# Altium PCB BAILEY.PcbDoc (part 6 of 8)
Units mil, origin at the board's own origin, x right, y up, seen from the top; angles counter-clockwise.
Board outline 4500 x 4000 mil, 4 copper layers (Signal Layer 1, Signal Layer 2, Signal Layer 3, Signal Layer 4), stack 59.904 mil thick; 190 components, 117 nets, 664 pads, 291 vias.
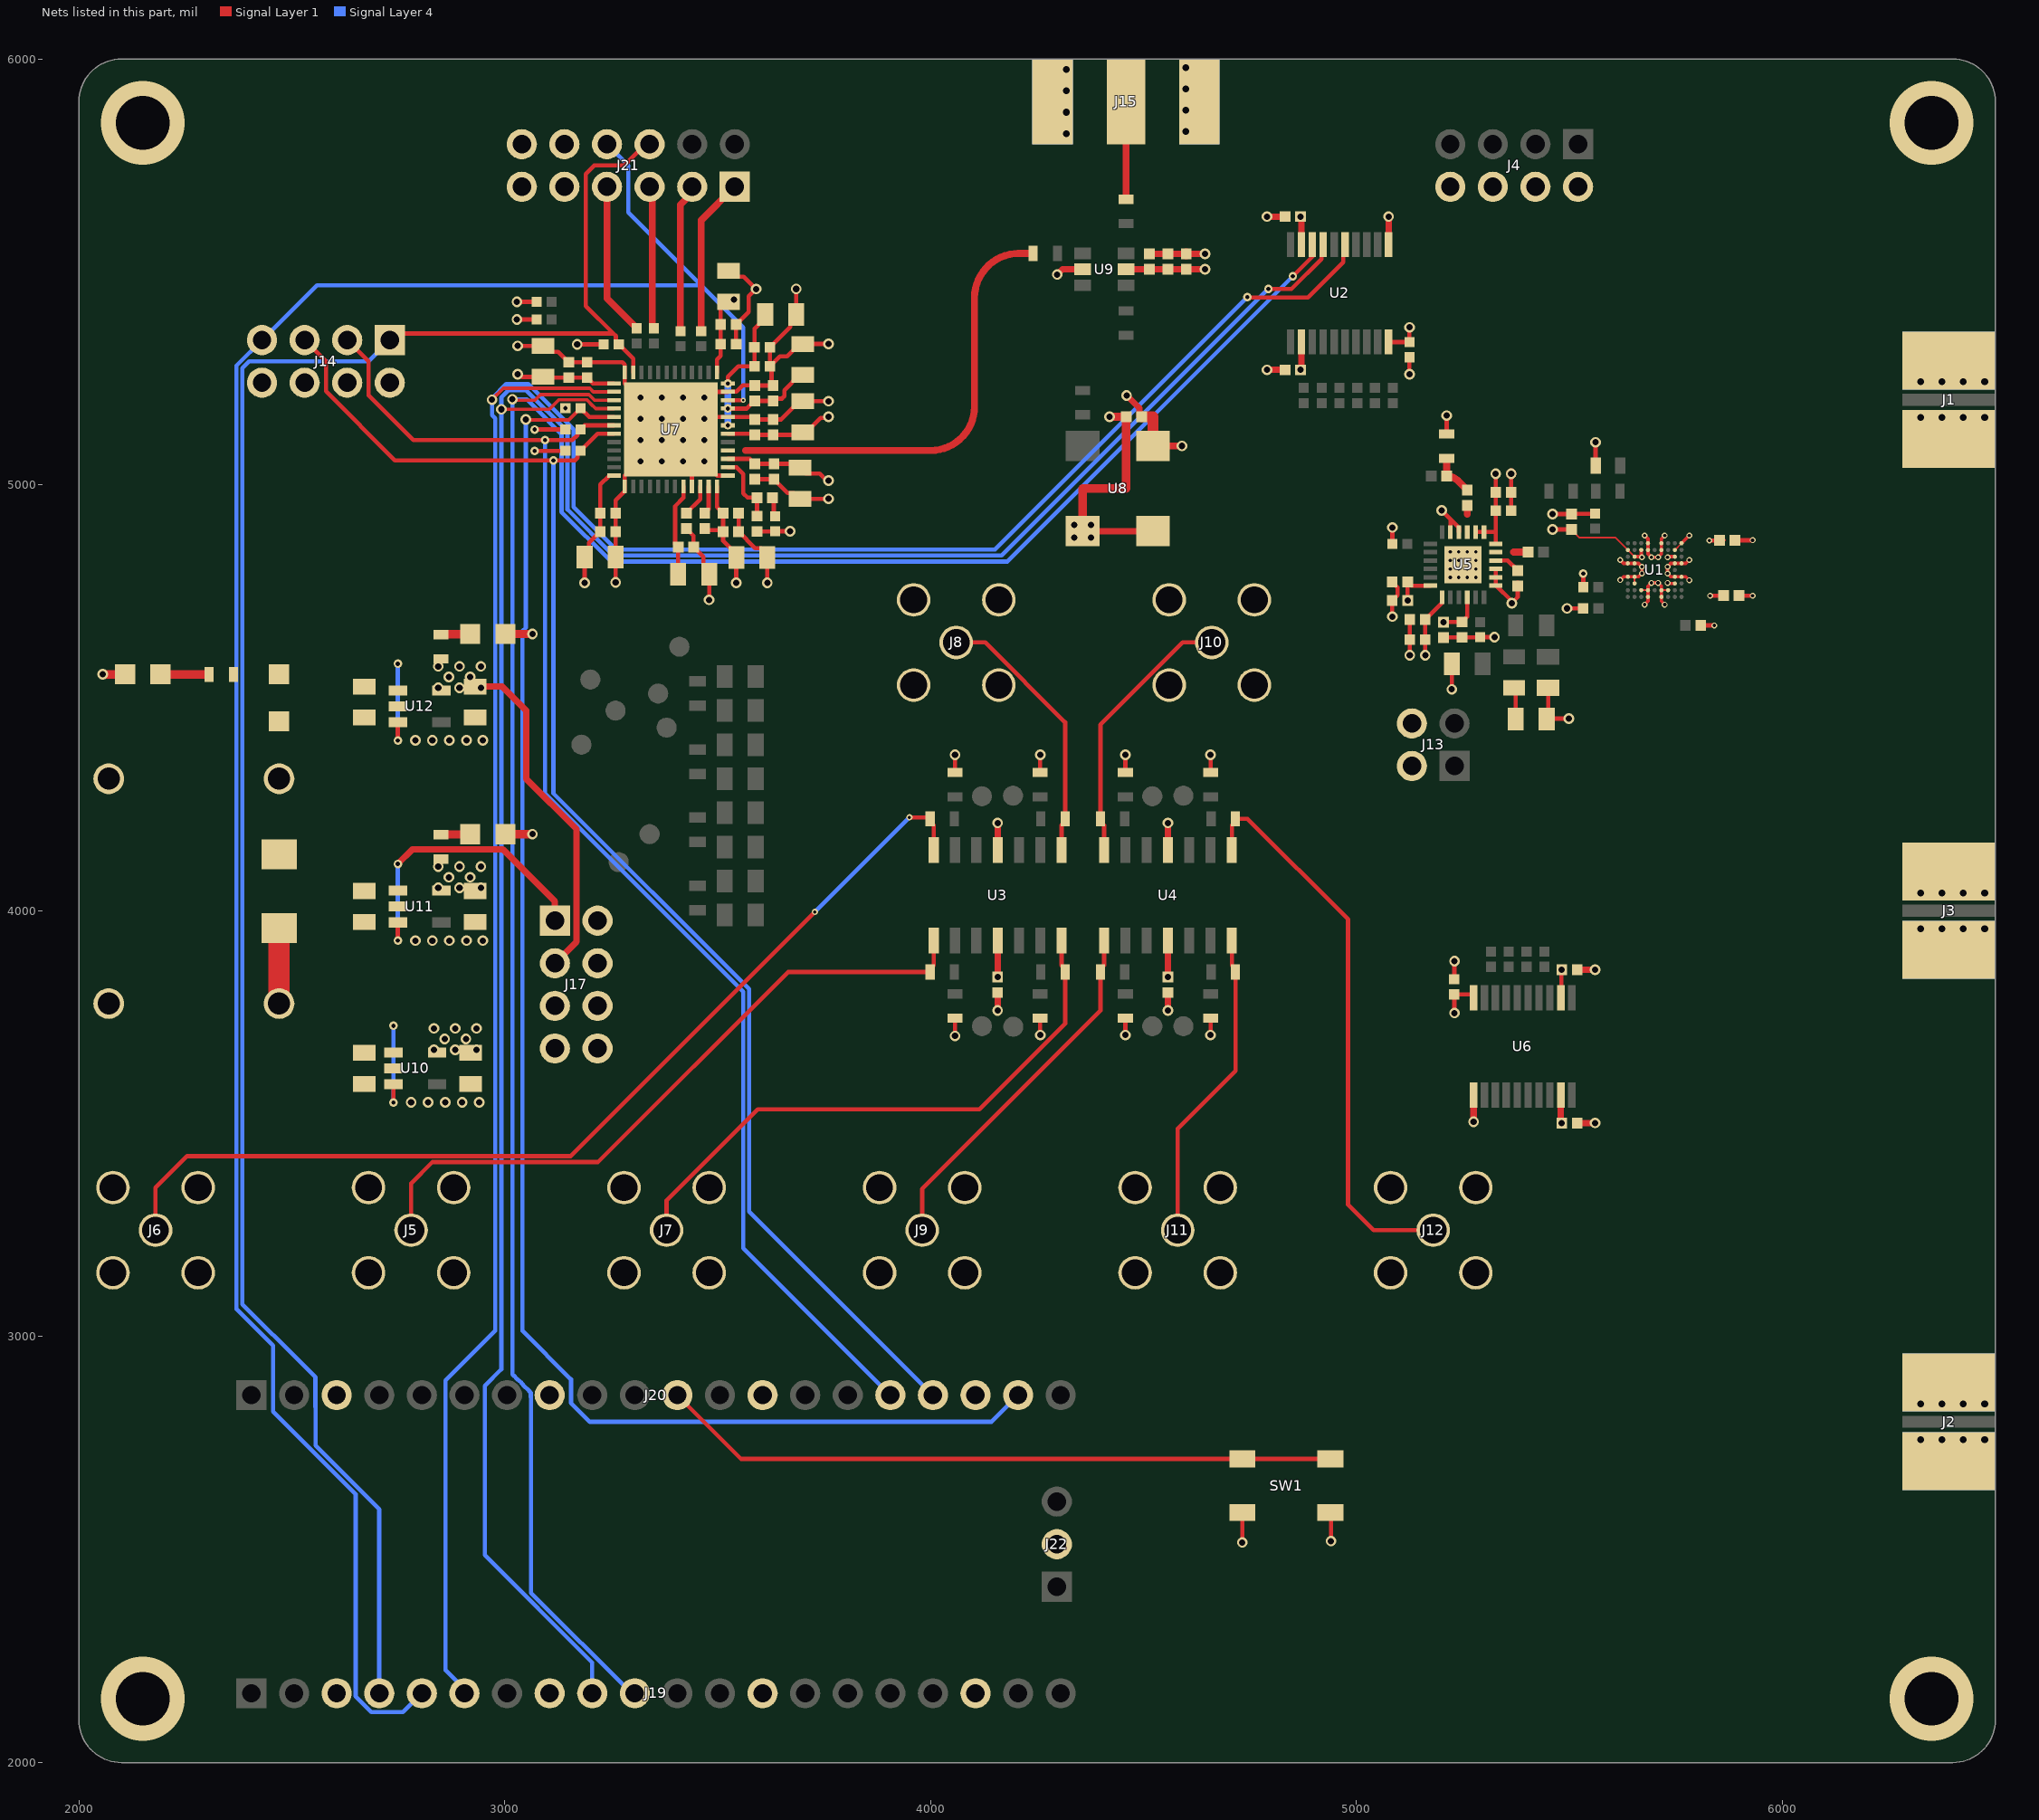
[diagram p4: the nets of this part, all layers, seen from the top]

## Part data (continued)
R54: library part RES, "100mW Thick Film Resistors 75V ±100ppm/℃ ±1% 1kΩ 0603 Chip Resistor - Surface Mount ROHS", Case Code (Imperial)=0603, Manufacturer=Yageo, Manufacturer Part Number=RC0603FR-071KL, Max Operating Temperature=155°C, Min Operating Temperature=-55°C, Power Dissipation=100mW, Supplier Part Number=311-1.00KHRCT-ND, Temperature Coefficient=100ppm/°C, Tolerance=1%, Voltage Rating=50V, Working Voltage=75V, Case Code (Metric)=0603, Case/Package=0603, Category="Chip SMD Resistors", China RoHS=Non-Compliant, ComponentLink1Description=https://datasheet.octopart.com:443/RC0603FR-071KL-Yageo-datasheet-175887523.pdf?src-supplier=Newark, ComponentLink1URL=https://datasheet.octopart.com:443/RC0603FR-071KL-Yageo-datasheet-175887523.pdf?src-supplier=Newark, ComponentLink2Description=https://datasheet.octopart.com:443/RC0603FR-071KL-Yageo-datasheet-34211833.pdf?src-supplier=Newark, ComponentLink2URL=https://datasheet.octopart.com:443/RC0603FR-071KL-Yageo-datasheet-34211833.pdf?src-supplier=Newark, ComponentLink3Description=https://datasheet.octopart.com:443/RC0603FR-071KL-Yageo-datasheet-12596169.pdf?src-supplier=Newark, ComponentLink3URL=https://datasheet.octopart.com:443/RC0603FR-071KL-Yageo-datasheet-12596169.pdf?src-supplier=Newark, ComponentLink4Description=https://datasheet.octopart.com:443/RC0603FR-071KL-Yageo-datasheet-499455.pdf?src-supplier=Newark, ComponentLink4URL=https://datasheet.octopart.com:443/RC0603FR-071KL-Yageo-datasheet-499455.pdf?src-supplier=Newark, ComponentLink5Description=https://datasheet.octopart.com:443/RC0603FR-071KL-Yageo-datasheet-503470.pdf?src-supplier=Newark, ComponentLink5URL=https://datasheet.octopart.com:443/RC0603FR-071KL-Yageo-datasheet-503470.pdf?src-supplier=Newark, ComponentLink6Description=https://datasheet.octopart.com:443/RC0603FR-071KL-Yageo-datasheet-62067350.pdf?src-supplier=element14+APAC, ComponentLink6URL=https://datasheet.octopart.com:443/RC0603FR-071KL-Yageo-datasheet-62067350.pdf?src-supplier=element14+APAC, ComponentLink7Description=https://datasheet.octopart.com:443/RC0603FR-071KL-Yageo-datasheet-21426514.pdf?src-supplier=element14+APAC, ComponentLink7URL=https://datasheet.octopart.com:443/RC0603FR-071KL-Yageo-datasheet-21426514.pdf?src-supplier=element14+APAC, ComponentLink8Description=https://datasheet.octopart.com:443/RC0603FR-071KL-Yageo-datasheet-141265859.pdf?src-supplier=Upverter, ComponentLink8URL=https://datasheet.octopart.com:443/RC0603FR-071KL-Yageo-datasheet-141265859.pdf?src-supplier=Upverter, ComponentLink9Description=https://datasheet.octopart.com:443/RC0603FR-071KL-Yageo-datasheet-103092701.pdf?src-supplier=Upverter, ComponentLink9URL=https://datasheet.octopart.com:443/RC0603FR-071KL-Yageo-datasheet-103092701.pdf?src-supplier=Upverter, ComponentLink10Description=https://sigma.octopart.com:443/138820526/technical_drawing/Yageo-RC0603FR-071KL.pdf?src-supplier=Upverter, ComponentLink10URL=https://sigma.octopart.com:443/138820526/technical_drawing/Yageo-RC0603FR-071KL.pdf?src-supplier=Upverter, ComponentLink11Description=https://datasheet.octopart.com:443/RC0603FR-071KL-Yageo-datasheet-68297981.pdf?src-supplier=Upverter, ComponentLink11URL=https://datasheet.octopart.com:443/RC0603FR-071KL-Yageo-datasheet-68297981.pdf?src-supplier=Upverter, ComponentLink12Description=https://datasheet.octopart.com:443/RC0603FR-071KL-Yageo-datasheet-8328172.pdf?src-supplier=Farnell, ComponentLink12URL=https://datasheet.octopart.com:443/RC0603FR-071KL-Yageo-datasheet-8328172.pdf?src-supplier=Farnell, ComponentLink13Description=https://datasheet.octopart.com:443/RC0603FR-071KL-Yageo-datasheet-13691069.pdf?src-supplier=Farnell, ComponentLink13URL=https://datasheet.octopart.com:443/RC0603FR-071KL-Yageo-datasheet-13691069.pdf?src-supplier=Farnell, ComponentLink14Description=https://datasheet.octopart.com:443/RC0603FR-071KL-Yageo-datasheet-15599030.pdf?src-supplier=Seeed+Studio, ComponentLink14URL=https://datasheet.octopart.com:443/RC0603FR-071KL-Yageo-datasheet-15599030.pdf?src-supplier=Seeed+Studio, ComponentLink15Description=https://datasheet.octopart.com:443/RC0603FR-071KL-Yageo-Group-datasheet-176638170.pdf?src-supplier=Future+Electronics, ComponentLink15URL=https://datasheet.octopart.com:443/RC0603FR-071KL-Yageo-Group-datasheet-176638170.pdf?src-supplier=Future+Electronics, ComponentLink16Description=https://datasheet.octopart.com:443/RC0603FR-071KL-Yageo-datasheet-164759695.pdf?src-supplier=Future+Electronics, ComponentLink16URL=https://datasheet.octopart.com:443/RC0603FR-071KL-Yageo-datasheet-164759695.pdf?src-supplier=Future+Electronics, ComponentLink17Description=https://datasheet.octopart.com:443/RC0603FR-071KL-Yageo-datasheet-137700087.pdf?src-supplier=Future+Electronics, ComponentLink17URL=https://datasheet.octopart.com:443/RC0603FR-071KL-Yageo-datasheet-137700087.pdf?src-supplier=Future+Electronics, ComponentLink18Description=https://datasheet.octopart.com:443/RC0603FR071KL-Yageo-datasheet-27584510.pdf?src-supplier=Future+Electronics, ComponentLink18URL=https://datasheet.octopart.com:443/RC0603FR071KL-Yageo-datasheet-27584510.pdf?src-supplier=Future+Electronics, ComponentLink19Description=https://datasheet.octopart.com:443/RC0603FR-071KL-Yageo-datasheet-8324193.pdf?src-supplier=Future+Electronics, ComponentLink19URL=https://datasheet.octopart.com:443/RC0603FR-071KL-Yageo-datasheet-8324193.pdf?src-supplier=Future+Electronics, ComponentLink20Description=https://datasheet.octopart.com:443/RC0603FR-071KL-Yageo-datasheet-79472498.pdf?src-supplier=Megastar, ComponentLink20URL=https://datasheet.octopart.com:443/RC0603FR-071KL-Yageo-datasheet-79472498.pdf?src-supplier=Megastar, ComponentLink21Description=https://datasheet.octopart.com/RC0603FR-071KL-Yageo-datasheet-73766026.pdf, ComponentLink21URL=https://datasheet.octopart.com/RC0603FR-071KL-Yageo-datasheet-73766026.pdf, ComponentLink22Description=https://datasheet.octopart.com:443/RC0603FR-071KL-Yageo-datasheet-118562.pdf?src-supplier=DigiKey, ComponentLink22URL=https://datasheet.octopart.com:443/RC0603FR-071KL-Yageo-datasheet-118562.pdf?src-supplier=DigiKey, ComponentLink23Description=http://sigma.octopart.com:80/conflict_mineral_statement/Yageo-company-3.pdf?src-supplier=Compliance+Statements, ComponentLink23URL=http://sigma.octopart.com:80/conflict_mineral_statement/Yageo-company-3.pdf?src-supplier=Compliance+Statements, ComponentLink24Description=http://sigma.octopart.com:80/rohs_statement/Yageo-company-2.pdf?src-supplier=Compliance+Statements, ComponentLink24URL=http://sigma.octopart.com:80/rohs_statement/Yageo-company-2.pdf?src-supplier=Compliance+Statements, Composition="Thick Film", Contact Plating=Tin, Country of Origin="Mainland China, Taiwan", Depth=800µm, Export Control Classification Number (ECCN) Code=EAR99, Harmonized Tariff Schedule (HTS) Code=8533.21.00.30, Height=450µm, Introduction Date=2004-10-04, Lead Free="Lead Free", Length=1.6mm, Lifecycle Status=Production, Military Standard=Not, Mounting Technology="Surface Mount", Number of Terminals=2, Package Size=0603, Packaging="Tape and Reel", Pins=2, Pricing="1=0.1, 10=0.008, 25=0.0076, 50=0.0072, 100=0.0061, 250=0.00568, 1000=0.00569, 5000=0.00204 (USD)", Radiation Hardening=No, REACH SVHC=Yes, RoHS=Compliant, Schedule B="8533210045, 8533210045|8533210045|8533210045|8533210045|8533210045|8533210045|8533210045|8533210045|8533210045|8533210045|8533210045|8533210045|8533210045|8533210045|8533210045|8533210045|8533210045|8533210045|8533210045|8533210045|8533210045|8533210045|8533210045|85", Stock=5944272, Supplier=DigiKey, Termination=SMD/SMT, Voltage Rating (DC)=50V, Width=800µm
R55: library part RES, "Res Thick Film 0603 178 Ohm 1% 0.1W(1/10W) ±100ppm/C Pad SMD T/R", Case Code (Imperial)=0603, Manufacturer=Yageo, Manufacturer Part Number=RC0603FR-07178RL, Max Operating Temperature=155°C, Min Operating Temperature=-55°C, Power Dissipation=100mW, Supplier Part Number=311-178HRCT-ND, Temperature Coefficient=100ppm/°C, Tolerance=1%, Voltage Rating=75V, Voltage Rating (DC)=50V, Case/Package=0603, Category="Chip SMD Resistors", China RoHS=Non-Compliant, ComponentLink1Description=https://datasheet.octopart.com:443/RC0603FR-07178RL-Yageo-datasheet-175887523.pdf?src-supplier=Newark, ComponentLink1URL=https://datasheet.octopart.com:443/RC0603FR-07178RL-Yageo-datasheet-175887523.pdf?src-supplier=Newark, ComponentLink2Description=https://datasheet.octopart.com:443/RC0603FR-07178RL-Yageo-datasheet-103092701.pdf?src-supplier=Upverter, ComponentLink2URL=https://datasheet.octopart.com:443/RC0603FR-07178RL-Yageo-datasheet-103092701.pdf?src-supplier=Upverter, ComponentLink3Description=https://datasheet.octopart.com:443/RC0603FR-07178RL-Yageo-Group-datasheet-176638170.pdf?src-supplier=Future+Electronics, ComponentLink3URL=https://datasheet.octopart.com:443/RC0603FR-07178RL-Yageo-Group-datasheet-176638170.pdf?src-supplier=Future+Electronics, ComponentLink4Description=https://datasheet.octopart.com:443/RC0603FR-07178RL-Yageo-datasheet-164759695.pdf?src-supplier=Future+Electronics, ComponentLink4URL=https://datasheet.octopart.com:443/RC0603FR-07178RL-Yageo-datasheet-164759695.pdf?src-supplier=Future+Electronics, ComponentLink5Description=https://datasheet.octopart.com:443/RC0603FR-07178RL-Yageo-datasheet-137700087.pdf?src-supplier=Future+Electronics, ComponentLink5URL=https://datasheet.octopart.com:443/RC0603FR-07178RL-Yageo-datasheet-137700087.pdf?src-supplier=Future+Electronics, ComponentLink6Description=https://datasheet.octopart.com:443/RC0603FR-07178RL-Yageo-datasheet-101672632.pdf?src-supplier=Future+Electronics, ComponentLink6URL=https://datasheet.octopart.com:443/RC0603FR-07178RL-Yageo-datasheet-101672632.pdf?src-supplier=Future+Electronics, ComponentLink7Description=https://datasheet.octopart.com:443/RC0603FR-07178RL-Yageo-datasheet-15599030.pdf?src-supplier=Future+Electronics, ComponentLink7URL=https://datasheet.octopart.com:443/RC0603FR-07178RL-Yageo-datasheet-15599030.pdf?src-supplier=Future+Electronics, ComponentLink8Description=https://datasheet.octopart.com:443/RC0603FR-07178RL-Yageo-datasheet-12596169.pdf?src-supplier=Future+Electronics, ComponentLink8URL=https://datasheet.octopart.com:443/RC0603FR-07178RL-Yageo-datasheet-12596169.pdf?src-supplier=Future+Electronics, ComponentLink9Description=https://datasheet.octopart.com:443/RC0603FR-07178RL-Yageo-datasheet-8328172.pdf?src-supplier=Future+Electronics, ComponentLink9URL=https://datasheet.octopart.com:443/RC0603FR-07178RL-Yageo-datasheet-8328172.pdf?src-supplier=Future+Electronics, ComponentLink10Description=https://datasheet.octopart.com:443/RC0603FR-07178RL-Yageo-datasheet-148775077.pdf?src-supplier=TME, ComponentLink10URL=https://datasheet.octopart.com:443/RC0603FR-07178RL-Yageo-datasheet-148775077.pdf?src-supplier=TME, ComponentLink11Description=https://datasheet.octopart.com/RC0603FR-07178RL-Yageo-datasheet-73766026.pdf, ComponentLink11URL=https://datasheet.octopart.com/RC0603FR-07178RL-Yageo-datasheet-73766026.pdf, ComponentLink12Description=https://datasheet.octopart.com:443/RC0603FR-07178RL-Yageo-datasheet-118562.pdf?src-supplier=DigiKey, ComponentLink12URL=https://datasheet.octopart.com:443/RC0603FR-07178RL-Yageo-datasheet-118562.pdf?src-supplier=DigiKey, ComponentLink13Description=http://sigma.octopart.com:80/conflict_mineral_statement/Yageo-company-3.pdf?src-supplier=Compliance+Statements, ComponentLink13URL=http://sigma.octopart.com:80/conflict_mineral_statement/Yageo-company-3.pdf?src-supplier=Compliance+Statements, ComponentLink14Description=http://sigma.octopart.com:80/rohs_statement/Yageo-company-2.pdf?src-supplier=Compliance+Statements, ComponentLink14URL=http://sigma.octopart.com:80/rohs_statement/Yageo-company-2.pdf?src-supplier=Compliance+Statements, Composition="Thick Film", Depth=800µm, Height=450µm, Lead Free="Lead Free", Length=1.6mm, Lifecycle Status=Production, Military Standard=Not, Mounting Technology="Surface Mount", Number of Terminals=2, Package Size=0603, Packaging="Tape & Reel", Pricing="1=0.1, 10=0.006, 25=0.0056, 50=0.0052 (USD)", REACH SVHC=Yes, RoHS=Compliant, Schedule B="8533210045, 8533210045|8533210045|8533210045|8533210045|8533210045", Stock=269039, Supplier=DigiKey, Termination=SMD/SMT, Width=800µm, Working Voltage=75V
SW1: "Switch Tactile OFF Mom SPST Round Button Gull Wing 50mA 12VDC 100000Cycles 1.77N Surface Mount T/R", Contact Current Rating=50mA, Contact Resistance="100 mΩ", Insulation Resistance="100 MΩ", Manufacturer=C&K, Max Operating Temperature=70°C, Max Voltage Rating (DC)=12V, Maximum Current="50 mA", Maximum Voltage="12 VDC", Min Operating Temperature=-40°C, Operating Force=2.26N, Supplier Part Number=108-PTS647SM38SMTR2LFSCT-ND, Bounce Time="<=5 ms", Category="Tactile Switches", ComponentLink1Description=https://datasheet.octopart.com:443/PTS647SM38SMTR2LFS-C%26K-Components-datasheet-180017464.pdf?src-supplier=IHS, ComponentLink1URL=https://datasheet.octopart.com:443/PTS647SM38SMTR2LFS-C%26K-Components-datasheet-180017464.pdf?src-supplier=IHS, ComponentLink2Description=https://datasheet.octopart.com:443/PTS647SM38SMTR2LFS-C%26K-Components-datasheet-117317067.pdf?src-supplier=Future+Electronics, ComponentLink2URL=https://datasheet.octopart.com:443/PTS647SM38SMTR2LFS-C%26K-Components-datasheet-117317067.pdf?src-supplier=Future+Electronics, ComponentLink3Description=https://datasheet.octopart.com:443/PTS647SM38SMTR2-LFS-C%26K-Components-datasheet-175422368.pdf?src-supplier=Farnell, ComponentLink3URL=https://datasheet.octopart.com:443/PTS647SM38SMTR2-LFS-C%26K-Components-datasheet-175422368.pdf?src-supplier=Farnell, ComponentLink4Description=https://datasheet.octopart.com:443/PTS647SM38SMTR2LFS-C%26K-Components-datasheet-145017121.pdf?src-supplier=Electro+Sonic, ComponentLink4URL=https://datasheet.octopart.com:443/PTS647SM38SMTR2LFS-C%26K-Components-datasheet-145017121.pdf?src-supplier=Electro+Sonic, ComponentLink5Description=https://datasheet.octopart.com:443/PTS-647-SM38-SMTR2-LFS-C%26K-Components-datasheet-119449707.pdf?src-supplier=RS+(Formerly+Allied+Electronics), ComponentLink5URL=https://datasheet.octopart.com:443/PTS-647-SM38-SMTR2-LFS-C%26K-Components-datasheet-119449707.pdf?src-supplier=RS+(Formerly+Allied+Electronics), Country of Origin="Mainland China", Electrical Life=100kcycles, Export Control Classification Number (ECCN) Code=EAR99, Harmonized Tariff Schedule (HTS) Code=8536.50.90.40, Height=2.9mm, Introduction Date=2019-06-11, Length=4.5mm, Life (Cycles)=100kcycles, Lifecycle Status=Production, Manufacturer Part Number=Y97KT23B2NAFP, Max Current Rating=50mA, Mounting Technology="Surface Mount", Number of Positions=1, Pricing="1=0.26, 10=0.226, 25=0.2116, 100=0.1897, 250=0.17588, 500=0.16596, 1000=0.15666 (USD)", REACH SVHC=Yes, RoHS=Compliant, Schedule B="8536509065, 8536509065|8536509065, 8536509065|8536509065|8536509065, 8536509065|8536509065|8536509065|8536509065", Stock=37245, Supplier=DigiKey, Throw Configuration=SPST, Voltage Rating (DC)=12V
TP1 TP2 TP3 TP4 TP5 TP6 TP7 TP8 TP9 TP10 TP11 TP12 TP13 TP14 TP15 TP16: "Test Point Generic"
U1: "Rf Transceiver, 24.25Ghz, -40 To 85Deg C Rohs Compliant: Yes", Clock Frequency=24.25GHz, Manufacturer="Infineon Technologies", Manufacturer Part Number=BGT24LTR22E6327XTSA1, Max Operating Temperature=85°C, Max Supply Voltage=1.6V, Min Operating Temperature=-40°C, Min Supply Voltage=1.45V, Supplier Part Number=448-BGT24LTR22E6327XTSA1CT-ND, Bandwidth=250MHz, Category="RF Receivers, Transceivers", China RoHS=Compliant, ComponentLink1Description=http://sigma.octopart.com:80/conflict_mineral_statement/Infineon-company-51.pdf?src-supplier=Compliance+Statements, ComponentLink1URL=http://sigma.octopart.com:80/conflict_mineral_statement/Infineon-company-51.pdf?src-supplier=Compliance+Statements, Harmonized Tariff Schedule (HTS) Code=8542.39.00.01, Height=800µm, Interface=SPI, Introduction Date=2020-02-17, Lifecycle Status=Production, Manufacturer Order Number=BGT24LTR22, PackageReference=PG-WFWLB-52-3, Pricing="1=14.82, 10=11.713, 25=10.9364, 100=10.0835, 250=9.67684, 500=9.43174, 1000=9.23005 (USD)", REACH SVHC=Yes, RoHS=Compliant, Stock=2023, Supplier=DigiKey
U2 U6: "8-Bit Bidirectional Voltage-Level Shifter with Auto Direction Sensing and +/-15-kV ESD Protect 20-TSSOP -40 to 85", Case/Package=TSSOP, High Level Output Current=-20µA, Low Level Output Current=20µA, Manufacturer="Texas Instruments", Manufacturer Lifecycle Status=ACTIVE, Manufacturer Package Identifier="PW (R-PDSO-G**)", Max Operating Temperature=85°C, Max Supply Voltage=5.5V, Min Operating Temperature=-40°C, Min Supply Voltage=1.65V, Quiescent Current=3.5µA, Supplier Part Number=296-21527-1-ND, Category="Voltage Level Shifters", ComponentLink1Description=https://sigma.octopart.com:443/157851284/technical_drawing/Texas-Instruments-TXB0108PWR.pdf?src-supplier=Texas+Instruments, ComponentLink1URL=https://sigma.octopart.com:443/157851284/technical_drawing/Texas-Instruments-TXB0108PWR.pdf?src-supplier=Texas+Instruments, ComponentLink2Description=https://octopart.com:443/opatz8j6/c1?t=LySuUYxN9QFMmqSZ0iSTBK1M-CfND3iA45F57-rgipnbsICCknTkoBhUukg2AkZDEL0aXzWd55iRogxa7qKL4TXUNFi6ipSyGXAAa9LZBdmP_Kv4vGBHh0qj-vgKaBFsF-d5KwYEI23cSnz-pp69Sgcy-_vsa0CB7mKhHXjctGx33TVX4QZBqIYpXxZkCgRNByv7fiJueXud0UX45YityO0p_-WYUGRJV_eJOGa4Ay7QQ8FZc3uEUNlVrkxXjQZMNFnbfnrSKCgesFBqhoNiKT25AC3yNUdmgJ7FLN5_z4zOzP0RR75DYkH4GMBnBzaYVRF7L7HNXVjS4Tp9-MFjD_sEQ-aCybQglHE52PnZL4JsgTDjFwelFwDtaMk_UKSdWjy_&src-supplier=Texas+Instruments, ComponentLink2URL=https://octopart.com:443/opatz8j6/c1?t=LySuUYxN9QFMmqSZ0iSTBK1M-CfND3iA45F57-rgipnbsICCknTkoBhUukg2AkZDEL0aXzWd55iRogxa7qKL4TXUNFi6ipSyGXAAa9LZBdmP_Kv4vGBHh0qj-vgKaBFsF-d5KwYEI23cSnz-pp69Sgcy-_vsa0CB7mKhHXjctGx33TVX4QZBqIYpXxZkCgRNByv7fiJueXud0UX45YityO0p_-WYUGRJV_eJOGa4Ay7QQ8FZc3uEUNlVrkxXjQZMNFnbfnrSKCgesFBqhoNiKT25AC3yNUdmgJ7FLN5_z4zOzP0RR75DYkH4GMBnBzaYVRF7L7HNXVjS4Tp9-MFjD_sEQ-aCybQglHE52PnZL4JsgTDjFwelFwDtaMk_UKSdWjy_&src-supplier=Texas+Instruments, ComponentLink3Description=https://datasheet.octopart.com:443/TXB0108PWR-Texas-Instruments-datasheet-34148259.pdf?src-supplier=Texas+Instruments, ComponentLink3URL=https://datasheet.octopart.com:443/TXB0108PWR-Texas-Instruments-datasheet-34148259.pdf?src-supplier=Texas+Instruments, ComponentLink4Description=https://datasheet.octopart.com:443/TXB0108PWR-Texas-Instruments-datasheet-11474939.pdf?src-supplier=Texas+Instruments, ComponentLink4URL=https://datasheet.octopart.com:443/TXB0108PWR-Texas-Instruments-datasheet-11474939.pdf?src-supplier=Texas+Instruments, ComponentLink5Description=https://datasheet.octopart.com:443/TXB0108PWR-Texas-Instruments-datasheet-10384694.pdf?src-supplier=Texas+Instruments, ComponentLink5URL=https://datasheet.octopart.com:443/TXB0108PWR-Texas-Instruments-datasheet-10384694.pdf?src-supplier=Texas+Instruments, ComponentLink6Description=https://datasheet.octopart.com:443/TXB0108PWR-Texas-Instruments-datasheet-10258393.pdf?src-supplier=Texas+Instruments, ComponentLink6URL=https://datasheet.octopart.com:443/TXB0108PWR-Texas-Instruments-datasheet-10258393.pdf?src-supplier=Texas+Instruments, ComponentLink7Description=https://sigma.octopart.com:443/49249835/technical_drawing/Texas-Instruments-TXB0108PWR.pdf?src-supplier=Texas+Instruments, ComponentLink7URL=https://sigma.octopart.com:443/49249835/technical_drawing/Texas-Instruments-TXB0108PWR.pdf?src-supplier=Texas+Instruments, ComponentLink8Description=https://datasheet.octopart.com:443/TXB0108PWR-Texas-Instruments-datasheet-37744618.pdf?src-supplier=Farnell, ComponentLink8URL=https://datasheet.octopart.com:443/TXB0108PWR-Texas-Instruments-datasheet-37744618.pdf?src-supplier=Farnell, ComponentLink9Description=https://datasheet.octopart.com:443/TXB0108PWR-Texas-Instruments-datasheet-8559414.pdf?src-supplier=Farnell, ComponentLink9URL=https://datasheet.octopart.com:443/TXB0108PWR-Texas-Instruments-datasheet-8559414.pdf?src-supplier=Farnell, ComponentLink10Description=https://datasheet.octopart.com:443/TXB0108PWR-Texas-Instruments-datasheet-5368061.pdf?src-supplier=Farnell, ComponentLink10URL=https://datasheet.octopart.com:443/TXB0108PWR-Texas-Instruments-datasheet-5368061.pdf?src-supplier=Farnell, ComponentLink11Description=https://datasheet.octopart.com:443/TXB0108PWR-Texas-Instruments-datasheet-66618004.pdf?src-supplier=Farnell, ComponentLink11URL=https://datasheet.octopart.com:443/TXB0108PWR-Texas-Instruments-datasheet-66618004.pdf?src-supplier=Farnell, ComponentLink12Description=https://datasheet.octopart.com:443/TXB0108PWR-Texas-Instruments-datasheet-48033010.pdf?src-supplier=Farnell, ComponentLink12URL=https://datasheet.octopart.com:443/TXB0108PWR-Texas-Instruments-datasheet-48033010.pdf?src-supplier=Farnell, ComponentLink13Description=https://datasheet.octopart.com:443/TXB0108PWR-Texas-Instruments-datasheet-10542789.pdf?src-supplier=Farnell, ComponentLink13URL=https://datasheet.octopart.com:443/TXB0108PWR-Texas-Instruments-datasheet-10542789.pdf?src-supplier=Farnell, ComponentLink14Description=https://datasheet.octopart.com:443/TXB0108PWR-Texas-Instruments-datasheet-151942.pdf?src-supplier=Upverter, ComponentLink14URL=https://datasheet.octopart.com:443/TXB0108PWR-Texas-Instruments-datasheet-151942.pdf?src-supplier=Upverter, ComponentLink15Description=https://datasheet.octopart.com:443/TXB0108PWR-Texas-Instruments-datasheet-11536343.pdf?src-supplier=Upverter, ComponentLink15URL=https://datasheet.octopart.com:443/TXB0108PWR-Texas-Instruments-datasheet-11536343.pdf?src-supplier=Upverter, ComponentLink16Description=https://datasheet.octopart.com:443/TXB0108PWR-Texas-Instruments-datasheet-33012939.pdf?src-supplier=element14+APAC, ComponentLink16URL=https://datasheet.octopart.com:443/TXB0108PWR-Texas-Instruments-datasheet-33012939.pdf?src-supplier=element14+APAC, ComponentLink17Description=https://datasheet.octopart.com:443/TXB0108PWR-Texas-Instruments-datasheet-165804950.pdf?src-supplier=LCSC, ComponentLink17URL=https://datasheet.octopart.com:443/TXB0108PWR-Texas-Instruments-datasheet-165804950.pdf?src-supplier=LCSC, ComponentLink18Description=https://datasheet.octopart.com:443/TXB0108PWR-Texas-Instruments-datasheet-159118386.pdf?src-supplier=LCSC, ComponentLink18URL=https://datasheet.octopart.com:443/TXB0108PWR-Texas-Instruments-datasheet-159118386.pdf?src-supplier=LCSC, ComponentLink19Description=https://datasheet.octopart.com:443/TXB0108PWR-Texas-Instruments-datasheet-137316104.pdf?src-supplier=Future+Electronics, ComponentLink19URL=https://datasheet.octopart.com:443/TXB0108PWR-Texas-Instruments-datasheet-137316104.pdf?src-supplier=Future+Electronics, ComponentLink20Description=https://datasheet.octopart.com:443/TXB0108PWR-Texas-Instruments-datasheet-14151550.pdf?src-supplier=iiiC, ComponentLink20URL=https://datasheet.octopart.com:443/TXB0108PWR-Texas-Instruments-datasheet-14151550.pdf?src-supplier=iiiC, ComponentLink21Description=https://datasheet.octopart.com:443/TXB0108PWR-Texas-Instruments-datasheet-126938.pdf?src-supplier=DigiKey, ComponentLink21URL=https://datasheet.octopart.com:443/TXB0108PWR-Texas-Instruments-datasheet-126938.pdf?src-supplier=DigiKey, ComponentLink22Description=http://sigma.octopart.com:80/reach_statement/Texas-Instruments-company-64.pdf?src-supplier=Compliance+Statements, ComponentLink22URL=http://sigma.octopart.com:80/reach_statement/Texas-Instruments-company-64.pdf?src-supplier=Compliance+Statements, ComponentLink23Description=http://sigma.octopart.com:80/conflict_mineral_statement/Texas-Instruments-company-63.pdf?src-supplier=Compliance+Statements, ComponentLink23URL=http://sigma.octopart.com:80/conflict_mineral_statement/Texas-Instruments-company-63.pdf?src-supplier=Compliance+Statements, Contact Plating=Gold, Data Rate=100Mbps, Height=0m, Lead Free="Lead Free", Length=6.5mm, Lifecycle Status=Production, Logic Function=Translator, Manufacturer Part Number=TXB0108PWR, Mounting Technology="Surface Mount", Number of Bits=8, Number of Channels=8, Number of Inputs=8, Output Current=20µA, Pins=20, Pricing="1=1.82, 10=1.338, 25=1.2176, 100=1.0851, 250=1.02184, 500=1.01132 (USD)", Propagation Delay=4ns, Radiation Hardening=No, REACH SVHC=No, Rise Time=7.3ns, RoHS=Compliant, Schedule B="8542390000, 8542390000|8542390000|8542390000|8542390000|8542390000", Stock=22043, Supplier=DigiKey, Termination=SMD/SMT, Thickness=1mm, Topology=Push-Pull, Turn-On Delay Time=9.5ns, Weight=76.997305mg, Width=4.4mm
U3 U4: "Quad, 5.5-V, 10-MHz, RRIO operational amplifier for cost-optimized applications 14-SOIC -40 to 125", Case/Package=SOIC, Manufacturer="Texas Instruments", Manufacturer Lifecycle Status=ACTIVE, Max Operating Temperature=125°C, Min Operating Temperature=-40°C, Supplier Part Number=296-47549-1-ND, Bandwidth=10MHz, Category="Amplifiers - Op Amps, Buffer, Instrumentation", ComponentLink1Description=https://sigma.octopart.com:443/182471030/technical_drawing/Texas-Instruments-TLV9064IDR.pdf?src-supplier=Texas+Instruments, ComponentLink1URL=https://sigma.octopart.com:443/182471030/technical_drawing/Texas-Instruments-TLV9064IDR.pdf?src-supplier=Texas+Instruments, ComponentLink2Description=https://octopart.com:443/opatz8j6/c1?t=b8RlzpfQG-h9uOWAabMAiPJWoCTgAwquZzec_BkdV6ZjMU2OI4YyppNX09BT2fM0gpcDMTQrYtgvce6_TtfmK4XZa-h4SQxM8TKEKMrJJktc7O_kAaPT_h62tC27hsW5hQAKMoGbKBjHibz2blvr-fhN1RVl1yW8EvD465A9BJDSrY_kRU3crDNophsG2nTX2Be3i9H2X4Kl0o-rARNMZYxgtWRCQAP9XVS_fu0jqO5PbtSNR57rXOk02X4GKKjnzDeVifR_OIS0uZ1j_pAkmvXspyYvhGUJvwUxZqgyekwRIScv7vrk5hgDM9rgOsgWHAf34DWgZgApfn4NaTTf5ebtlEHCtjJg6ABKjJ4CBoMZf9D-5muRZyk3ZTspSwA1lzBPrFk&src-supplier=Texas+Instruments, ComponentLink2URL=https://octopart.com:443/opatz8j6/c1?t=b8RlzpfQG-h9uOWAabMAiPJWoCTgAwquZzec_BkdV6ZjMU2OI4YyppNX09BT2fM0gpcDMTQrYtgvce6_TtfmK4XZa-h4SQxM8TKEKMrJJktc7O_kAaPT_h62tC27hsW5hQAKMoGbKBjHibz2blvr-fhN1RVl1yW8EvD465A9BJDSrY_kRU3crDNophsG2nTX2Be3i9H2X4Kl0o-rARNMZYxgtWRCQAP9XVS_fu0jqO5PbtSNR57rXOk02X4GKKjnzDeVifR_OIS0uZ1j_pAkmvXspyYvhGUJvwUxZqgyekwRIScv7vrk5hgDM9rgOsgWHAf34DWgZgApfn4NaTTf5ebtlEHCtjJg6ABKjJ4CBoMZf9D-5muRZyk3ZTspSwA1lzBPrFk&src-supplier=Texas+Instruments, ComponentLink3Description=https://sigma.octopart.com:443/49249646/technical_drawing/Texas-Instruments-TLV9064IDR.pdf?src-supplier=Texas+Instruments, ComponentLink3URL=https://sigma.octopart.com:443/49249646/technical_drawing/Texas-Instruments-TLV9064IDR.pdf?src-supplier=Texas+Instruments, ComponentLink4Description=https://datasheet.octopart.com:443/TLV9064IDR-Texas-Instruments-datasheet-101609303.pdf?src-supplier=Farnell, ComponentLink4URL=https://datasheet.octopart.com:443/TLV9064IDR-Texas-Instruments-datasheet-101609303.pdf?src-supplier=Farnell, ComponentLink5Description=https://datasheet.octopart.com:443/TLV9064IDR-Texas-Instruments-datasheet-160738807.pdf?src-supplier=LCSC, ComponentLink5URL=https://datasheet.octopart.com:443/TLV9064IDR-Texas-Instruments-datasheet-160738807.pdf?src-supplier=LCSC, ComponentLink6Description=https://datasheet.octopart.com:443/TLV9064IDR-Texas-Instruments-datasheet-159117845.pdf?src-supplier=LCSC, ComponentLink6URL=https://datasheet.octopart.com:443/TLV9064IDR-Texas-Instruments-datasheet-159117845.pdf?src-supplier=LCSC, ComponentLink7Description=http://sigma.octopart.com:80/reach_statement/Texas-Instruments-company-64.pdf?src-supplier=Compliance+Statements, ComponentLink7URL=http://sigma.octopart.com:80/reach_statement/Texas-Instruments-company-64.pdf?src-supplier=Compliance+Statements, ComponentLink8Description=http://sigma.octopart.com:80/conflict_mineral_statement/Texas-Instruments-company-63.pdf?src-supplier=Compliance+Statements, ComponentLink8URL=http://sigma.octopart.com:80/conflict_mineral_statement/Texas-Instruments-company-63.pdf?src-supplier=Compliance+Statements, Height=0m, Length=8.65mm, Lifecycle Status=Production, Manufacturer Part Number=TLV9064IDR, Number of Channels=4, Packaging="Cut Tape", Pins=14, Pricing="1=1.49, 10=1.085, 25=0.9844, 100=0.8739, 250=0.8212, 500=0.78944, 1000=0.76329 (USD)", RoHS=Compliant, Schedule B="8542330000, 8542330000|8542330000|8542330000|8542330000|8542330000", Slew Rate=6.5V/µs, Stock=4493, Supplier=DigiKey, Thickness=1.58mm, Width=3.91mm
U5: "IC Pll Freq Synthesizer 24LFCSP \"IC 13GHZ 1 24-WFQFN Exposed Pad, Csp\"", Case/Package="LFCSP EP", Clock Frequency=13GHz, Manufacturer="Analog Devices", Manufacturer Lifecycle Status=PRODUCTION, Manufacturer_Name="Analog Devices Inc", Max Operating Temperature=125°C, Max Supply Current=40mA, Max Supply Voltage=3.45V, Min Operating Temperature=-40°C, Min Supply Voltage=2.7V, Nominal Supply Current=33mA, Category="Clock Generators, PLLs, Frequency Synthesizers", ComponentLink1Description=https://datasheet.octopart.com:443/ADF4159CCPZ-Analog-Devices-datasheet-28359207.pdf?src-supplier=Newark, ComponentLink1URL=https://datasheet.octopart.com:443/ADF4159CCPZ-Analog-Devices-datasheet-28359207.pdf?src-supplier=Newark, ComponentLink2Description=https://datasheet.octopart.com:443/ADF4159CCPZ-Analog-Devices-datasheet-23761417.pdf?src-supplier=Newark, ComponentLink2URL=https://datasheet.octopart.com:443/ADF4159CCPZ-Analog-Devices-datasheet-23761417.pdf?src-supplier=Newark, ComponentLink3Description=https://datasheet.octopart.com:443/ADF4159CCPZ-Analog-Devices-datasheet-11761967.pdf?src-supplier=Newark, ComponentLink3URL=https://datasheet.octopart.com:443/ADF4159CCPZ-Analog-Devices-datasheet-11761967.pdf?src-supplier=Newark, ComponentLink4Description=https://octopart.com:443/opatz8j6/c1?t=sFpxmdEK-TpWxew3lQPHWXAdM5czz84jkTjdAblxL2FLtgSnnJtHzcZ7eDVrY5wUr_SVqsz_Dp2fz8ZtN6lVO8uzYTTInUBy26MK382qZeiAUDaS88UR4ELIN2ZU7XFIVaK4UL8ObL4flxWtc7ks8pYJfkdBDqO7QR7iH-p_7135f50wuHOzpbmA4pBW-bckYVq5mgo5pYPHvD0dMhS4_c77dJySLl7uu4XVnigltr6SOw_ybHZCS7HIqQ2lc5ypX2E6NLk_TCC2erJi_2-Ybzi1S5UkxB_CfPGHcszzu0v9JbzFJPfherc&src-supplier=Analog+Devices, ComponentLink4URL=https://octopart.com:443/opatz8j6/c1?t=sFpxmdEK-TpWxew3lQPHWXAdM5czz84jkTjdAblxL2FLtgSnnJtHzcZ7eDVrY5wUr_SVqsz_Dp2fz8ZtN6lVO8uzYTTInUBy26MK382qZeiAUDaS88UR4ELIN2ZU7XFIVaK4UL8ObL4flxWtc7ks8pYJfkdBDqO7QR7iH-p_7135f50wuHOzpbmA4pBW-bckYVq5mgo5pYPHvD0dMhS4_c77dJySLl7uu4XVnigltr6SOw_ybHZCS7HIqQ2lc5ypX2E6NLk_TCC2erJi_2-Ybzi1S5UkxB_CfPGHcszzu0v9JbzFJPfherc&src-supplier=Analog+Devices, ComponentLink5Description=https://datasheet.octopart.com:443/ADF4159CCPZ-Analog-Devices-datasheet-101563325.pdf?src-supplier=Augswan, ComponentLink5URL=https://datasheet.octopart.com:443/ADF4159CCPZ-Analog-Devices-datasheet-101563325.pdf?src-supplier=Augswan, ComponentLink6Description=https://datasheet.octopart.com:443/ADF4159CCPZ-Analog-Devices-datasheet-16077098.pdf?src-supplier=element14+APAC, ComponentLink6URL=https://datasheet.octopart.com:443/ADF4159CCPZ-Analog-Devices-datasheet-16077098.pdf?src-supplier=element14+APAC, ComponentLink7Description=https://datasheet.octopart.com:443/ADF4159CCPZ-Analog-Devices-datasheet-140566762.pdf?src-supplier=Arrow.cn, ComponentLink7URL=https://datasheet.octopart.com:443/ADF4159CCPZ-Analog-Devices-datasheet-140566762.pdf?src-supplier=Arrow.cn, ComponentLink8Description=http://sigma.octopart.com:80/conflict_mineral_statement/Analog-Devices-company-33.pdf?src-supplier=Compliance+Statements, ComponentLink8URL=http://sigma.octopart.com:80/conflict_mineral_statement/Analog-Devices-company-33.pdf?src-supplier=Compliance+Statements, ComponentLink9Description=https://octopart.com:443/opatz8j6/c1?t=4AUWQOYY8hDK56fWYIFCkzZGK-WlRlfj3W59qJ6lN0Or0dqBi-BZtouAdLLcZ0g9GpUibARjvwKelFok923HesNjOwvjJbGuJIFFDtkFLQoAtw9O0oSsPiBrvEsgVLQ8yyZZa0MUOvDC9pb6dfm0a_5Zj_Vp7K3DrxroK-yAUp5WMn8ukNugC5wnzgVIb4QKMMJ7PwoxZFfV1QgXJzgUp4ZWxSHfn6Mn-DyBM67ES7wx5acptrPz2a-iVPxqbhd_bTw80SeUQ9yQIgwDbxKtCFSTQqp_tPFf7XLfJysxGOlPYb3Go66K7jI&src-supplier=Compliance+Statements, ComponentLink9URL=https://octopart.com:443/opatz8j6/c1?t=4AUWQOYY8hDK56fWYIFCkzZGK-WlRlfj3W59qJ6lN0Or0dqBi-BZtouAdLLcZ0g9GpUibARjvwKelFok923HesNjOwvjJbGuJIFFDtkFLQoAtw9O0oSsPiBrvEsgVLQ8yyZZa0MUOvDC9pb6dfm0a_5Zj_Vp7K3DrxroK-yAUp5WMn8ukNugC5wnzgVIb4QKMMJ7PwoxZFfV1QgXJzgUp4ZWxSHfn6Mn-DyBM67ES7wx5acptrPz2a-iVPxqbhd_bTw80SeUQ9yQIgwDbxKtCFSTQqp_tPFf7XLfJysxGOlPYb3Go66K7jI&src-supplier=Compliance+Statements, Copyright="Copyright (C) 2025 Ultra Librarian. All rights reserved.", Frequency=13GHz, Height=750µm, Input=CMOS, Lead Free="Contains Lead", Length=4.1mm, Lifecycle Status=Production, Manufacturer Part Number=ADF4159CCPZ, Manufacturer_Part_Number=ADF4159CCPZ, Mounting Technology="Surface Mount", Number of Circuits=1, Number of Outputs=1, Operating Supply Current=40mA, Pins=24, PLL=Yes, Pricing="1=14.01, 10=12.76 (USD)", Radiation Hardening=No, REACH SVHC=No, RefDes=RefDes, RoHS=Compliant, Schedule B="8542390000, 8542390000|8542390000|8542390000|8542390000|8542390000|8542390000|8542390000|8542390000|8542390000|8542390000|8542390000|8542390000|8542390000|8542390000|8542390000|8542390000|8542390000|8542390000|8542390000|8542390000|8542390000|8542390000|8542390000|85", Stock=16, Supplier="Arrow Electronics", Supplier Part Number=ADF4159CCPZ, Type=Type, Width=4.1mm
U7: "4-Channel Quad ADC Delta-Sigma 1.8Msps 16-bit Parallel/Serial Automotive 48-Pin LFCSP EP T/R", Case/Package=QFN, Manufacturer="Analog Devices", Manufacturer Lifecycle Status="NOT RECOMMENDED FOR NEW DESIGN", Manufacturer Part Number=ADAR7251WBCSZ-RL, Manufacturer_Name="Analog Devices Inc", Max Operating Temperature=125°C, Min Operating Temperature=-40°C, Category="Analog to Digital Converters (ADCs)", ComponentLink1Description=https://datasheet.octopart.com:443/ADAR7251WBCSZ-RL-Analog-Devices-datasheet-37108182.pdf?src-supplier=Upverter, ComponentLink1URL=https://datasheet.octopart.com:443/ADAR7251WBCSZ-RL-Analog-Devices-datasheet-37108182.pdf?src-supplier=Upverter, ComponentLink2Description=https://octopart.com:443/opatz8j6/c1?t=CQmgxgzF3TS1DSQPN3cDiG0EYWfU1hgwPhmTexDVZLnR1yZQOElAuyPbML9mgDJkPVxpVD3gYcoY03UYbhc9VkRaca9L0HaHtXuMsNFf2r7kStaMExwc3y8Qy8XWZPSfY4husBBcSXxc0bo4wKO_VIhVldzI7K2uCW-t-YqmoWcieXASzNGiaG2Bub2XzkGmAw1BAALsiXjrYth_GIRcMxKMuexNTsFZxWzEW-RJC1yoCn1dh43rOqnwSWnkt7ugxSJEi6_2jxpsji6pZNy2X20IdN1ynU6w9VyR75RcBgi_pduDOVpUW0AX&src-supplier=Analog+Devices, ComponentLink2URL=https://octopart.com:443/opatz8j6/c1?t=CQmgxgzF3TS1DSQPN3cDiG0EYWfU1hgwPhmTexDVZLnR1yZQOElAuyPbML9mgDJkPVxpVD3gYcoY03UYbhc9VkRaca9L0HaHtXuMsNFf2r7kStaMExwc3y8Qy8XWZPSfY4husBBcSXxc0bo4wKO_VIhVldzI7K2uCW-t-YqmoWcieXASzNGiaG2Bub2XzkGmAw1BAALsiXjrYth_GIRcMxKMuexNTsFZxWzEW-RJC1yoCn1dh43rOqnwSWnkt7ugxSJEi6_2jxpsji6pZNy2X20IdN1ynU6w9VyR75RcBgi_pduDOVpUW0AX&src-supplier=Analog+Devices, ComponentLink3Description=https://datasheet.octopart.com:443/ADAR7251WBCSZ-RL-Analog-Devices-datasheet-79793795.pdf?src-supplier=SHENGYU+ELECTRONICS, ComponentLink3URL=https://datasheet.octopart.com:443/ADAR7251WBCSZ-RL-Analog-Devices-datasheet-79793795.pdf?src-supplier=SHENGYU+ELECTRONICS, ComponentLink4Description=http://sigma.octopart.com:80/conflict_mineral_statement/Analog-Devices-company-33.pdf?src-supplier=Compliance+Statements, ComponentLink4URL=http://sigma.octopart.com:80/conflict_mineral_statement/Analog-Devices-company-33.pdf?src-supplier=Compliance+Statements, ComponentLink5Description=https://octopart.com:443/opatz8j6/c1?t=QP5QRZ8fNHIlvGQJKDbEcehpvKXZdY016AwOjUrM50DrZC_R-f1Pg-EuaWOyKDZH9OBd7dWivR_i3nk3Xo26w2sGsBnPhkVsSzYG81pmL3ea60Kmr0a8UUo0ZL-YYfNFq7KTASlEeG1WvdeIoSBT5hBvzH64l4FkDtEivSQbImbmNw6Y08ax0d8WdYuFh5ejQZzFivnYTWpTOoJzNsRVn8w6iClEFe_CmzJzioseeE7rWrtas6d9CbFF5KEvx48S6-N7O0YoKKepe4BUbaANJTYqghQhF1t7el8qVACiHhz-ck11jaWvVU3U&src-supplier=Compliance+Statements, ComponentLink5URL=https://octopart.com:443/opatz8j6/c1?t=QP5QRZ8fNHIlvGQJKDbEcehpvKXZdY016AwOjUrM50DrZC_R-f1Pg-EuaWOyKDZH9OBd7dWivR_i3nk3Xo26w2sGsBnPhkVsSzYG81pmL3ea60Kmr0a8UUo0ZL-YYfNFq7KTASlEeG1WvdeIoSBT5hBvzH64l4FkDtEivSQbImbmNw6Y08ax0d8WdYuFh5ejQZzFivnYTWpTOoJzNsRVn8w6iClEFe_CmzJzioseeE7rWrtas6d9CbFF5KEvx48S6-N7O0YoKKepe4BUbaANJTYqghQhF1t7el8qVACiHhz-ck11jaWvVU3U&src-supplier=Compliance+Statements, Copyright="Copyright (C) 2025 Ultra Librarian. All rights reserved.", Datasheet=https://www.analog.com/media/en/technical-documentation/data-sheets/ADAR7251.pdf, Interface="Parallel, SPI", Lead Free="Contains Lead", Lifecycle Status=Production, Manufacturer_Part_Number=ADAR7251WBCSZ, Number of A/D Converters=4, Number of Bits=16, Number of Inputs=4, Packaging="Tape and Reel", Pins=48, Pricing="1=17.58, 10=17.31, 25=17.04, 100=16.77, 250=16.49, 500=16.22, 1000=15.95 (USD)", RefDes=RefDes, RoHS=Compliant, Sampling Rate=1.8Msps, Schedule B="8542390000, 8542390000|8542390000|8542390000|8542390000|8542390000", Stock=1518, Supplier="Arrow Electronics", Supplier Part Number=ADAR7251WBCSZ-RL, Type=Type
U8: "LVCMOS Output Clock Oscillator, 50MHz Nom", Case/Package=SMD/SMT, Frequency="50 MHz", Frequency Stability="+-25 ppm", Load Capacitance=15pF, Manufacturer=Connor-Winfield, Max Operating Temperature=70°C, Max Supply Current=30mA, Max Supply Voltage=3.465V, Min Operating Temperature=-20°C, Min Supply Voltage=3.135V, Operating Supply Voltage=3.3V, Supplier Part Number=CW541CT-ND, Supply Voltage="3.3 V", Temperature Range="-20C to 70C", Body Material=Ceramic, Category=Oscillators, ComponentLink1Description=https://datasheet.octopart.com:443/CWX813-050.0M-Connor-Winfield-datasheet-14434119.pdf?src-supplier=IHS, ComponentLink1URL=https://datasheet.octopart.com:443/CWX813-050.0M-Connor-Winfield-datasheet-14434119.pdf?src-supplier=IHS, Fall Time=6ns, Height=1.2954mm, Lead Free="Lead Free", Length=7.0104mm, Lifecycle Status=Production, Manufacturer Part Number=CWX813-050.0M, Mounting Technology="Surface Mount", Nominal Supply Current=30mA, Number of Terminals=4, Output Type=LVCMOS, Pricing="1=4.46, 10=3.878, 25=3.6668, 50=3.5152, 100=3.37, 250=3.28952 (USD)", REACH SVHC=Yes, Rise Time=6ns, RoHS=Compliant, Stock=2522, Supplier=DigiKey, Width=5.0038mm
U9: "IC CLK BUFFER 1: 3 150MHZ SOT23-6 Clock Fanout Buffer (Distribution) IC 1: 3 150 MHz SOT-23-6", Clock Frequency=150MHz, Manufacturer="Microchip Technology", Manufacturer Part Number=PL133-37TC-R, Max Operating Temperature=70°C, Min Operating Temperature=0°C, Supplier Part Number=PL133-37TC-RCT-ND, Category="Clock Buffers, Drivers", ComponentLink1Description=https://datasheet.octopart.com:443/PL133-37TC-R-Microchip-datasheet-147335889.pdf?src-supplier=Microchip, ComponentLink1URL=https://datasheet.octopart.com:443/PL133-37TC-R-Microchip-datasheet-147335889.pdf?src-supplier=Microchip, ComponentLink2Description=https://datasheet.octopart.com:443/PL133-37TC-R-Microchip-datasheet-62314940.pdf?src-supplier=SHENGYU+ELECTRONICS, ComponentLink2URL=https://datasheet.octopart.com:443/PL133-37TC-R-Microchip-datasheet-62314940.pdf?src-supplier=SHENGYU+ELECTRONICS, ComponentLink3Description=https://datasheet.octopart.com:443/PL133-37TC-R-Microchip-datasheet-21302506.pdf?src-supplier=Future+Electronics, ComponentLink3URL=https://datasheet.octopart.com:443/PL133-37TC-R-Microchip-datasheet-21302506.pdf?src-supplier=Future+Electronics, ComponentLink4Description=http://sigma.octopart.com:80/188449425/materials_sheet/Microchip-PL133-37TC-R.pdf?src-supplier=Compliance+Statements, ComponentLink4URL=http://sigma.octopart.com:80/188449425/materials_sheet/Microchip-PL133-37TC-R.pdf?src-supplier=Compliance+Statements, ComponentLink5Description=http://sigma.octopart.com:80/rohs_statement/Microchip-company-71.pdf?src-supplier=Compliance+Statements, ComponentLink5URL=http://sigma.octopart.com:80/rohs_statement/Microchip-company-71.pdf?src-supplier=Compliance+Statements, ComponentLink6Description=http://sigma.octopart.com:80/reach_statement/Microchip-company-70.pdf?src-supplier=Compliance+Statements, ComponentLink6URL=http://sigma.octopart.com:80/reach_statement/Microchip-company-70.pdf?src-supplier=Compliance+Statements, ComponentLink7Description=http://sigma.octopart.com:80/conflict_mineral_statement/Microchip-company-69.pdf?src-supplier=Compliance+Statements, ComponentLink7URL=http://sigma.octopart.com:80/conflict_mineral_statement/Microchip-company-69.pdf?src-supplier=Compliance+Statements, ComponentLink8Description=http://sigma.octopart.com:80/conflict_mineral_statement/Microchip-company-68.pdf?src-supplier=Compliance+Statements, ComponentLink8URL=http://sigma.octopart.com:80/conflict_mineral_statement/Microchip-company-68.pdf?src-supplier=Compliance+Statements, Country of Assembly=Taiwan, Country of Fabrication=N/A, Country of Origin=Taiwan, Export Control Classification Number (ECCN) Code=EAR99, Harmonized Tariff Schedule (HTS) Code=8542.39.0060, Input=LVCMOS, Lead Free="Lead Free", Lifecycle Status=Production, Mounting Technology="Surface Mount", Number of Circuits=1, Pins=6, Pricing="1=0.75, 25=0.62, 100=0.56 (USD)", Projected EOL Date=2039-07-02, RoHS=Compliant, Stock=11353, Supplier=DigiKey
U10: "1-A, low-IQ high-accuracy low-dropout (LDO) voltage regulator with enable 5-SOT-23 -40 to 125", Case/Package=SOT-23, Manufacturer="Texas Instruments", Manufacturer Lifecycle Status=ACTIVE, Output Current="1 A", Output Voltage="1.5 V", Supplier Part Number=296-51811-1-ND, Category="LDO Voltage Regulators", ComponentLink1Description=https://sigma.octopart.com:443/177332311/technical_drawing/Texas-Instruments-TLV75715PDBVR.pdf?src-supplier=Texas+Instruments, ComponentLink1URL=https://sigma.octopart.com:443/177332311/technical_drawing/Texas-Instruments-TLV75715PDBVR.pdf?src-supplier=Texas+Instruments, ComponentLink2Description=https://octopart.com:443/opatz8j6/c1?t=d7hvVLm4alBnrD3gkoHfRsgVc1UpAt6tbgzimL6eSJHfNPIcKrEVXQLPrKOO7wEDCX4HSMm6lfhF85OQD0xZdGvf6YWAiJrNuU8QSKvAnaGmkYyNKOgtKPgJdm2OaEBsByZGVv6T58nARThbWe1wCDIr6BKAyHSOruR31SjFlLsIzO3eYwhk2SNazcjQEifyacoOczK47_MXfEqqNpMaSiFFoskCbrfDKYLBx_wVUhWKdX9fsUXPW-zYIgEWS08DbpwwKwl3pwwBgOyAlAA6_Yry7nSOOwYgpeH3zDS82lMdNd1MWU3-D1w86_UIiW06pjzBAlAruU2xcUUpgVxcbRgleA5mpoOQkUHtNLHgmtjr9P-5BMHIlnvvtbjHE33fVSndxig&src-supplier=Texas+Instruments, ComponentLink2URL=https://octopart.com:443/opatz8j6/c1?t=d7hvVLm4alBnrD3gkoHfRsgVc1UpAt6tbgzimL6eSJHfNPIcKrEVXQLPrKOO7wEDCX4HSMm6lfhF85OQD0xZdGvf6YWAiJrNuU8QSKvAnaGmkYyNKOgtKPgJdm2OaEBsByZGVv6T58nARThbWe1wCDIr6BKAyHSOruR31SjFlLsIzO3eYwhk2SNazcjQEifyacoOczK47_MXfEqqNpMaSiFFoskCbrfDKYLBx_wVUhWKdX9fsUXPW-zYIgEWS08DbpwwKwl3pwwBgOyAlAA6_Yry7nSOOwYgpeH3zDS82lMdNd1MWU3-D1w86_UIiW06pjzBAlAruU2xcUUpgVxcbRgleA5mpoOQkUHtNLHgmtjr9P-5BMHIlnvvtbjHE33fVSndxig&src-supplier=Texas+Instruments, ComponentLink3Description=https://sigma.octopart.com:443/175570406/technical_drawing/Texas-Instruments-TLV75715PDBVR.pdf?src-supplier=Texas+Instruments, ComponentLink3URL=https://sigma.octopart.com:443/175570406/technical_drawing/Texas-Instruments-TLV75715PDBVR.pdf?src-supplier=Texas+Instruments, ComponentLink4Description=https://sigma.octopart.com:443/169406034/technical_drawing/Texas-Instruments-TLV75715PDBVR.pdf?src-supplier=Texas+Instruments, ComponentLink4URL=https://sigma.octopart.com:443/169406034/technical_drawing/Texas-Instruments-TLV75715PDBVR.pdf?src-supplier=Texas+Instruments, ComponentLink5Description=https://sigma.octopart.com:443/155939316/technical_drawing/Texas-Instruments-TLV75715PDBVR.pdf?src-supplier=Texas+Instruments, ComponentLink5URL=https://sigma.octopart.com:443/155939316/technical_drawing/Texas-Instruments-TLV75715PDBVR.pdf?src-supplier=Texas+Instruments, ComponentLink6Description=https://sigma.octopart.com:443/102331370/technical_drawing/Texas-Instruments-TLV75715PDBVR.pdf?src-supplier=Texas+Instruments, ComponentLink6URL=https://sigma.octopart.com:443/102331370/technical_drawing/Texas-Instruments-TLV75715PDBVR.pdf?src-supplier=Texas+Instruments, ComponentLink7Description=https://datasheet.octopart.com:443/TLV75715PDBVR-Texas-Instruments-datasheet-164419132.pdf?src-supplier=Augswan, ComponentLink7URL=https://datasheet.octopart.com:443/TLV75715PDBVR-Texas-Instruments-datasheet-164419132.pdf?src-supplier=Augswan, ComponentLink8Description=http://sigma.octopart.com:80/reach_statement/Texas-Instruments-company-64.pdf?src-supplier=Compliance+Statements, ComponentLink8URL=http://sigma.octopart.com:80/reach_statement/Texas-Instruments-company-64.pdf?src-supplier=Compliance+Statements, ComponentLink9Description=http://sigma.octopart.com:80/conflict_mineral_statement/Texas-Instruments-company-63.pdf?src-supplier=Compliance+Statements, ComponentLink9URL=http://sigma.octopart.com:80/conflict_mineral_statement/Texas-Instruments-company-63.pdf?src-supplier=Compliance+Statements, Height=1.45mm, Length=2.9mm, Lifecycle Status=Production, Manufacturer Part Number=TLV75715PDBVR, Number of Channels=1, Pins=5, Pricing="1=0.33, 10=0.229, 25=0.2032, 100=0.1751, 250=0.16168, 500=0.15358, 1000=0.14692 (USD)", RoHS=Compliant, Schedule B="8542390000, 8542390000|8542390000|8542390000|8542390000|8542390000", Stock=5294, Supplier=DigiKey, Thickness=1.2mm, Width=1.6mm